# Altium PCB AntiStartingCrap.PcbDoc
Units mm, origin at the board's own origin, x right, y up, seen from the top; angles counter-clockwise.
Board outline 18 x 12 mm, 4 copper layers (Top Layer, Internal Plane 1, Internal Plane 2, Bottom Layer), stack 1.54 mm thick; 19 components, 15 nets, 73 pads, 89 vias.
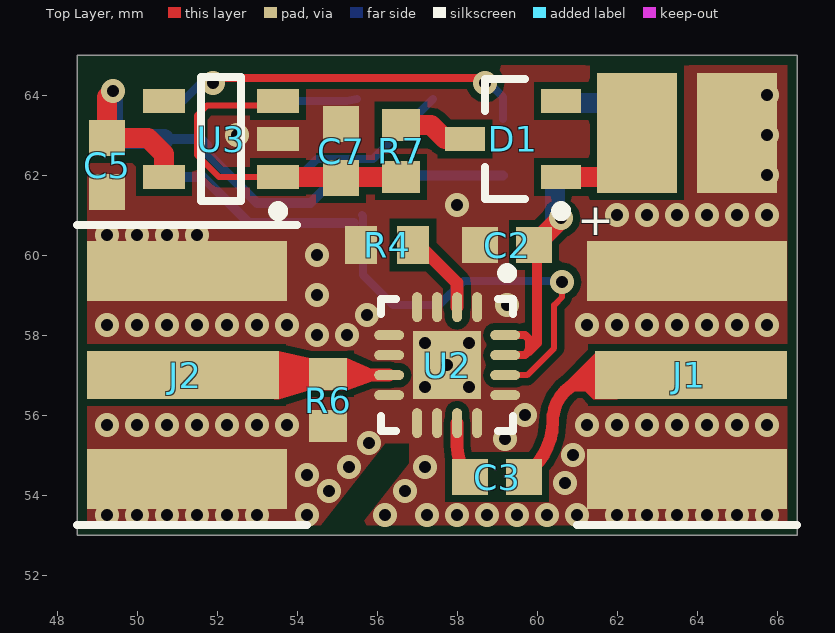
[diagram p0: Top Layer view]
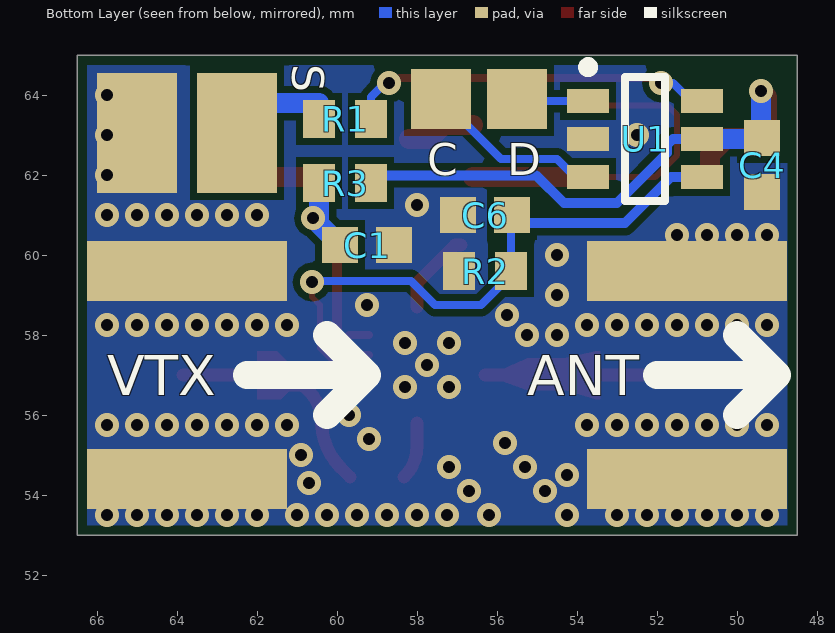
[diagram p1: Bottom Layer view, seen from below]
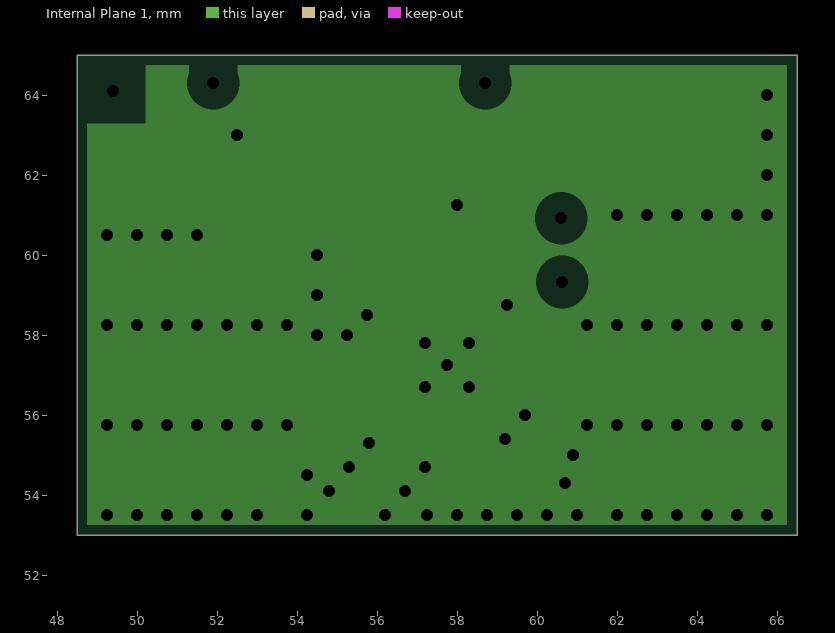
[diagram p2: Internal Plane 1, clearances drawn from the general rule]
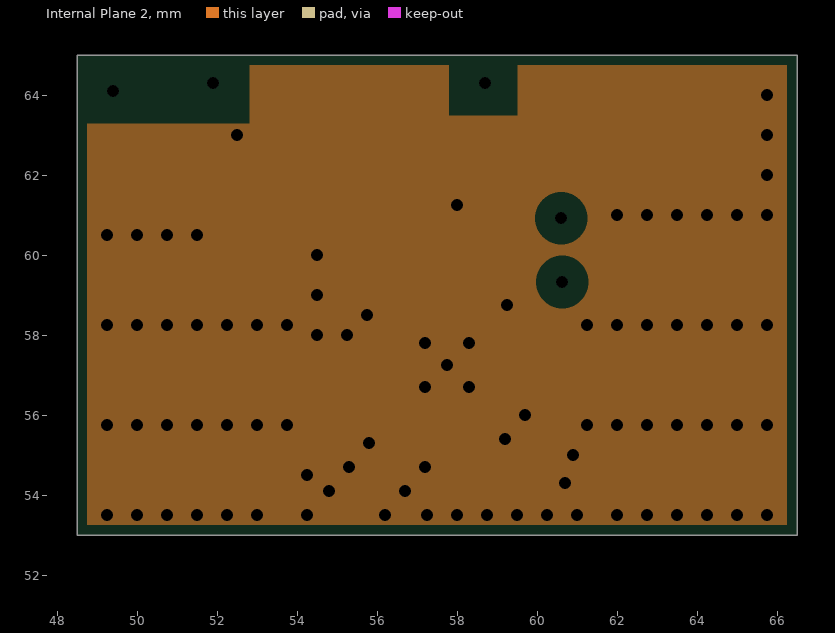
[diagram p3: Internal Plane 2, clearances drawn from the general rule]

## Layer stack, top to bottom
Top Solder: solder mask 0.0102, Solder Resist, Dk 3.5
Top Layer: signal copper 0.035
Dielectric 1: prepreg 0.2, FR-4, Dk 4.2
Internal Plane 1: plane copper 0.035, net GND
Dielectric 3: core 1, Dk 4.2
Internal Plane 2: plane copper 0.035, net GND
Dielectric 2: prepreg 0.2, Dk 4.2
Bottom Layer: signal copper 0.035
Bottom Solder: solder mask 0.0102, Solder Resist, Dk 3.5

## Board outline
48.5,65 66.5,65 66.5,53 48.5,53

## Design rules (kind name [scope] priority, off if disabled: settings)
Clearance [All] p1: gap=0.18
MinimumSolderMaskSliver [All] p1: minsoldermaskwidth=0.2
PlaneClearance [All] p1: clearance=0.508
PlaneConnect [All] p1: planeconnectstyle=Direct reliefexpansion=0.508 reliefentries=4 reliefconductorwidth=0.254 reliefairgap=0.254
PolygonConnect [All] p1: connectstyle=Direct reliefconductorwidth=0.254 reliefentries=4 polygonreliefangle="90 Angle" airgapwidth=0.254
RoutingVias [All] p1: holewidth=0.711 width=1.27 viastyle="Through Hole" minholewidth=0.3 minwidth=0.6 maxholewidth=0.711 maxwidth=1.27
SolderMaskExpansion [All] p1: expansion=0.102
Width [All] p1: maxlimit=4 minlimit=0.15 preferedwidth=0.254
27 further rules are at their usual default settings.

## Components (designator, comment, footprint, x,y, rotation, side; value= is the part's Value field where it differs from the comment)
C1 "100 nF" CAPC1608X10L 59.25,60.25 r0 bottom
C2 "22 pF" CAPC1608X10L 59.25,60.25 r0 top
C3 "10 nF" CAPC1608X10L 59,54.45 r180 top
C4 "100 nF" CAPC1608X10L 49.375,62.25 r90 bottom
C5 "2.2 uF" CAPC1608X10L 49.25,62.25 r90 top
C6 "22 pF" CAPC1608X10L 56.3,61 r180 bottom
C7 "2.2 uF" CAPC1608X10L 55.1,62.6 r270 top
D1 "BAT54SLT1G" SOT95P237X111-3N 59.4,62.9 r180 top
J1 "RPSMA_MACHO_CHINO" SMACHINO 63.75,57 r180 top
J2 "RPSMA_HEMBRA_CHINO" SMACHINO 51.25,57 r0 top
R1 "1 k" RESC1608X05N 59.8,63.4 r0 bottom
R2 "1 M" RESC1608X05N 56.3,59.6 r0 bottom
R3 "1 k" RESC1608X05N 59.8,61.8 r0 bottom
R4 "49.9" RESC1608X05N 56.25,60.25 r180 top
R6 "1 M" RESC1608X05N 54.775,56.375 r270 top
R7 "1 k" RESC1608X05N 56.6,62.6 r270 top
U1 "PIC10F200T-I/OT" SOT95P270X145-6N 52.3,62.9 r180 bottom
U2 "PE42423MLBA-Z" "QFN50P300X300X90_HS-17N _PEREGRINE" 57.75,57.25 r270 top
U3 "AP2204K-3.3TRG1" SOT95P270X145-5N 52.1,62.9 r180 top

## Footprints (in the part's own frame and the unit in brackets; to place one, negate y for a bottom-side part, rotate by r counter-clockwise, add the part's x,y. Pads: shape width x height; smd on the part's side, far side on the other; paste and mask are expansions set on the pad)
CAPC1608X10L [mm] "Chip Capacitor, 2-Leads, Body 1,60x0,80mm, IPC High Density"
  rect 0.9x0.9 smd: 1(-0.675,0) 2(0.675,0)
  body extent -0.9,-0.5 0.9,0.5, height 1
"QFN50P300X300X90_HS-17N _PEREGRINE" [mm] "QFN, 16-Leads, Body 3,00x3,00mm, Pitch 0,50mm, Thermal Pad 1,70x1,70mm, IPC Medium Density"
  oval 0.75x0.25 smd: 1(-1.45,0.75) 2(-1.45,0.25) 3(-1.45,-0.25) 4(-1.45,-0.75) 9(1.45,-0.75) 10(1.45,-0.25) 11(1.45,0.25) 12(1.45,0.75)
  oval 0.25x0.75 smd: 5(-0.75,-1.45) 6(-0.25,-1.45) 7(0.25,-1.45) 8(0.75,-1.45) 13(0.75,1.45) 14(0.25,1.45) 15(-0.25,1.45) 16(-0.75,1.45)
  rect 1.7x1.7 smd: 17(0,0)
  silkscreen extent -2.42,-1.65 1.65,1.65, body extent -1.5,-1.5 1.5,1.5, height 0.9
RESC1608X05N [mm] "Chip Resistor, 2-Leads, Body 1,57x0,85mm, IPC Medium Density"
  rect 0.8x0.95 smd: 1(-0.65,0) 2(0.65,0)
  body extent -0.83,-0.48 0.82,0.48, height 0.5
SMACHINO [mm]
  rect 4.8x1.2 smd: 1(-0.1,0)
  rect 5x1.5 smd: 2(0,2.6) 3(0,-2.6)
  rect 5x1.5 smd far side: 4(0,2.6) 5(0,-2.6)
  silkscreen extent -2.75,3.75 2.75,3.75
SOT95P237X111-3N [mm] "SOT23, 3-Leads, Body 2,92x2,37mm, Pitch 0,95mm, IPC Medium Density"
  rect 1x0.6 smd: 1(-1.2,0.95) 2(-1.2,-0.95) 3(1.2,0)
  silkscreen extent -1.33,-1.5 0.7,1.92, body extent -0.7,-1.52 0.7,1.52, height 1.11
SOT95P270X145-5N [mm] "SOT23, 5-Leads, Body 2,90x2,70mm, Pitch 0,95mm, IPC Medium Density"
  rect 1.05x0.6 smd: 1(-1.425,0.95) 2(-1.425,0) 3(-1.425,-0.95) 4(1.425,-0.95) 5(1.425,0.95)
  silkscreen extent -1.55,-1.55 0.5,1.92, body extent -0.9,-1.55 0.9,1.55, height 1.45
SOT95P270X145-6N [mm] "SOT23, 6-Leads, Body 2,90x2,70mm, Pitch 0,95mm, IPC Medium Density"
  rect 1.05x0.6 smd: 1(-1.425,0.95) 2(-1.425,0) 3(-1.425,-0.95) 4(1.425,-0.95) 5(1.425,0) 6(1.425,0.95)
  silkscreen extent -1.55,-1.55 0.5,1.92, body extent -0.9,-1.55 0.9,1.55, height 1.45

## Part data
C1 C4: library part CL10B104KA8NNNC, "CAP CER 0.1UF 25V X7R 0603"
C2 C6: library part GCM1885C1H220JA16D, "CAP CER 22PF 50V NP0 0603"
C3: library part GRM1885C1H103JA01D, "CAP CER 10000PF 50V NP0 0603"
C5 C7: library part GRM188R61E225MA12D, "CAP CER 2.2UF 25V X5R 0603"
D1: "Schottky Diodes & Rectifiers 30V 225mW Dual"
R1 R3 R7: library part CRCW06031K00FKEA, "Thick Film Resistors - SMD 1/10watt 1.0Kohms 1%"
R2 R6: library part CRCW06031M00FKEA, "Thick Film Resistors - SMD 1/10watt 1.0Mohms 1%"
R4: library part CRCW060349R9FKEA, "RES SMD 49.9 OHM 1% 1/10W 0603"
U1: "IC MCU 8BIT 384B FLASH SOT23-6"
U2: "IC RF SWITCH SPDT 50 OHM 16QFN"
U3: "IC REG LDO 3.3V 0.15A SOT25"

## Free pads (board coordinates)
  rect 2x3 smd: 6(62.5,63.05) 7(65,63.05)
  rect 2x3 smd far side: 7(62.5,63.05) 7(65,63.05)
  rect 1.5x1.5 smd far side: 9(55.5,63.9) 9(57.4,63.9)

## Via types
v1: diameter 0.6, hole 0.3, Top Layer to Bottom Layer, tented both sides, 89 vias

## Nets (pads, with @x,y where several pads share a name; then routed paths per layer and width w, separated by ;. In a path a pad name is that pad's centre, name@x,y a point inside that pad or via, vN(x,y) a via of type N, cw(c..) or ccw(c..) an arc to the next point about the centre after c; other vN are vias at no path point)
3V3: C4.2 C5.2 R3.1 U1.5 U3.5 | length 15.3
  Top Layer w0.5: v1(49.4,64.1) 49.25,63.95 C5.2 50.275,62.925 50.675,62.525 U3.5
  Bottom Layer w0.25: U1.5 51.6,62.9 51.75,62.75 51.75,62.55 53,61.3 54.331,61.3 55.026,61.995 R3.1@59.15,61.995
  Bottom Layer w0.5: C4.2@49.275,62.9 U1.5@50.675,62.9 ; C4.2 49.4,62.95 v1(49.4,64.1)
+5V: D1.1 pad.6 | length 0.9
  Top Layer w0.5: D1.1 pad.6@61.55,61.95
GND: C1.1 C2.1 C4.1 C5.1 C6.1 C7.1 J1.2 J1.3 J1.4 J1.5 J2.2 J2.3 J2.4 J2.5 pad.7@65,63.05 R2.2 R4.2 R6.2 U1.2 U2.1 U2.3 U2.4 U2.5 U2.6 U2.8 U2.9 U2.10 U2.12 U2.13 U2.17 U3.2
  other v1: 49.25,53.5 50,53.5 50.75,53.5 51.5,53.5 52.25,53.5 53,53.5 54.25,53.5 56.2,53.5 57.25,53.5 58,53.5 58.75,53.5 59.5,53.5 60.25,53.5 61,53.5 62,53.5 62.75,53.5 63.5,53.5 64.25,53.5 65,53.5 65.75,53.5 54.8,54.1 56.7,54.1 60.7,54.3 54.25,54.5 55.3,54.7 57.2,54.7 60.9,55 55.8,55.3 59.2,55.4 49.25,55.75 50,55.75 50.75,55.75 51.5,55.75 52.25,55.75 53,55.75 53.75,55.75 61.25,55.75 62,55.75 62.75,55.75 63.5,55.75 64.25,55.75 65,55.75 65.75,55.75 59.7,56 57.2,56.7 58.3,56.7 57.75,57.25 57.2,57.8 58.3,57.8 54.5,58 55.25,58 49.25,58.25 50,58.25 50.75,58.25 51.5,58.25 52.25,58.25 53,58.25 53.75,58.25 61.25,58.25 62,58.25 62.75,58.25 63.5,58.25 64.25,58.25 65,58.25 65.75,58.25 55.75,58.5 59.25,58.75 54.5,59 54.5,60 49.25,60.5 50,60.5 50.75,60.5 51.5,60.5 62,61 62.75,61 63.5,61 64.25,61 65,61 65.75,61 58,61.25 65.75,62 52.5,63 65.75,63 65.75,64
GP3_IN: pad.7@62.5,63.05 R1.2 | length 1.3
  Bottom Layer w0.5: R1.2@60.45,63.8 pad.7@61.75,63.8
NetC1_2: C1.2 C2.2 R3.2 U2.15 U2.16 | length 7.8
  Top Layer w0.2: U2.15 59.7,57.5 59.8,57.6 59.8,57.9 59.7,58 U2.16
  Top Layer w0.25: 59.8,57.6 60,57.8 60,60.175 C2.2
  Top Layer w0.5: C2.2 v1(60.6,60.925)
  Bottom Layer w0.25: C1.2@59.925,60.4 v1@60.45,60.925
  Bottom Layer w0.5: C1.2 60.45,60.775 60.45,60.925 R3.2
NetC3_1: C3.1 J1.1 | length 5.7
  Top Layer w0.32: C3.1 59.905,54.68 ccw(c58.732,55.852) 60.389,55.79 ccw(c58.732,55.852) 60.39,55.852 cw(c61.448,55.852) 60.4,55.997 cw(c61.448,55.852) 60.7,56.6 cw(c61.666,55.634) 61.666,57 J1.1
NetC3_2: C3.2 U2.11 | length 1.4
  Top Layer w0.32: U2.11 58,55.235 ccw(c59.11,55.235) C3.2
NetC6_2: C6.2 R2.1 U1.4 U2.14 | length 15.3
  Top Layer w0.15: U2.14 59.75,57 60.425,57.675 60.425,58.75 60.628,58.953 v1(60.628,59.328)
  Bottom Layer w0.15: v1@60.6,59.356 v1(60.628,59.328)
  Bottom Layer w0.2: C6.2 55.65,60.975 R2.1 55.65,59.5 56.4,58.75 57.55,58.75 58.156,59.356 v1@60.6,59.356
  Bottom Layer w0.25: U1.4 51.65,61.95 52.8,60.8 C6.2@55.425,60.8
NetC7_2: C7.2 R7.2 U3.1 U3.3 | length 8.5
  Top Layer w0.15: U3.1 52.05,61.95 51.5,62.5 51.5,63.495 51.75,63.745 53.42,63.745 U3.3
  Top Layer w0.5: U3.1 R7.2
NetD1_3: D1.3 R7.1 | length 1.7
  Top Layer w0.5: R7.1 57.35,63.25 57.7,62.9 D1.3
NetJ2_1: J2.1 R6.1 U2.7 | length 5.1
  Top Layer w0.32: J2.1 U2.7
NetR1_1: R1.1 U1.6 | length 9.3
  Top Layer w0.2: v1(51.9,64.3) 52.03,64.43 58.47,64.43 58.6,64.3 v1(58.7,64.3)
  Bottom Layer w0.2: U1.6 51.15,63.85 51.6,64.3 v1(51.9,64.3) ; v1(58.7,64.3) 58.8,64.3 59.15,63.95 R1.1
NetR4_1: R4.1 U2.2 | length 2.1
  Top Layer w0.32: R4.1 57.05,60.25 58,59.3 U2.2
PGC: pad.9@57.4,63.9 U1.3 | length 4.5
  Bottom Layer w0.2: U1.3 54.05,61.95 54.5,62.4 55.9,62.4 pad.9@57.4,63.9
PGD: pad.9@55.5,63.9 U1.1 | length 2
  Bottom Layer w0.2: U1.1@53.525,63.85 55.25,63.85 pad.9@55.5,63.9
pads on no net: D1.2 U3.4

## Polygon pours and split planes (outlines as drawn)
GND on Bottom Layer "Bottom Layer-No Net" (solid, remove dead copper, pour order 4): 48.75,64.75 48.75,53.25 66.25,53.25 66.25,64.75
GND on Top Layer "Bottom Layer-No Net" (solid, remove dead copper, pour order 3): 48.75,64.75 48.75,53.25 66.25,53.25 66.25,64.75
GND on Internal Plane 1 (split plane): 66.248,53.252 48.752,53.252 48.752,63.3 50.2,63.3 50.2,64.748 51.3,64.748 51.3,64.5 52.5,64.5 52.5,64.748 58.1,64.748 58.1,64.5 59.3,64.5 59.3,64.748 66.248,64.748
GND on Internal Plane 2 (split plane): 66.248,53.252 48.752,53.252 48.752,63.3 52.8,63.3 52.8,64.748 57.8,64.748 57.8,63.5 59.5,63.5 59.5,64.748 66.248,64.748

## Other copper
Top Layer:
  pour cut-out: 54.4,53 56.2,55.3 56.8,55.3 56.8,54.8 55.4,53
  region net NetJ2_1: 53.425,57.6 53.55,57.6 54.325,57.425 55.25,57.425 55.875,57.15 55.875,56.85 55.25,56.625 54.3,56.625 53.55,56.4 53.425,56.4
  region net NetC3_1: 62,57.6 61.5,57.6 60.7,56.8 60.9,56.6 61.2,56.6 61.4,56.4 62,56.4
Internal Plane 1 (plane layer: these items are gaps in the copper):
  rectangle: 58.1,64.5 59.3,65
  rectangle: 51.3,64.5 52.5,64.9
  rectangle: 48.5,63.3 50.2,65
  lines w0.5: 48.5,64.3 48.752,64.748 49.2,65
Internal Plane 2 (plane layer: these items are gaps in the copper):
  rectangle: 57.8,63.5 59.5,65
  rectangle: 48.5,63.3 52.8,65
  lines w0.5: 48.5,64.2 48.752,64.748 49.3,65

## Silkscreen, mask and mechanical layers (free items; w line width, h text height)
Top Overlay:
  text "+" at 61,60.5 h0.8
Bottom Overlay:
  lines w0.7: 50,56 49,57 ; 50,58 49,57 ; 52,57 49,57 ; 60.25,56 59.25,57 ; 60.25,58 59.25,57 ; 62.25,57 59.25,57
  text "S" at 61.125,64.775 h0.8 r90
  text "D" at 55.75,62 h0.8
  text "C" at 57.75,62 h0.8
  text "ANT" at 55.25,56.5 h1
  text "VTX" at 65.75,56.5 h1